# EAGLE board arduino (EAGLE 9.6.2)
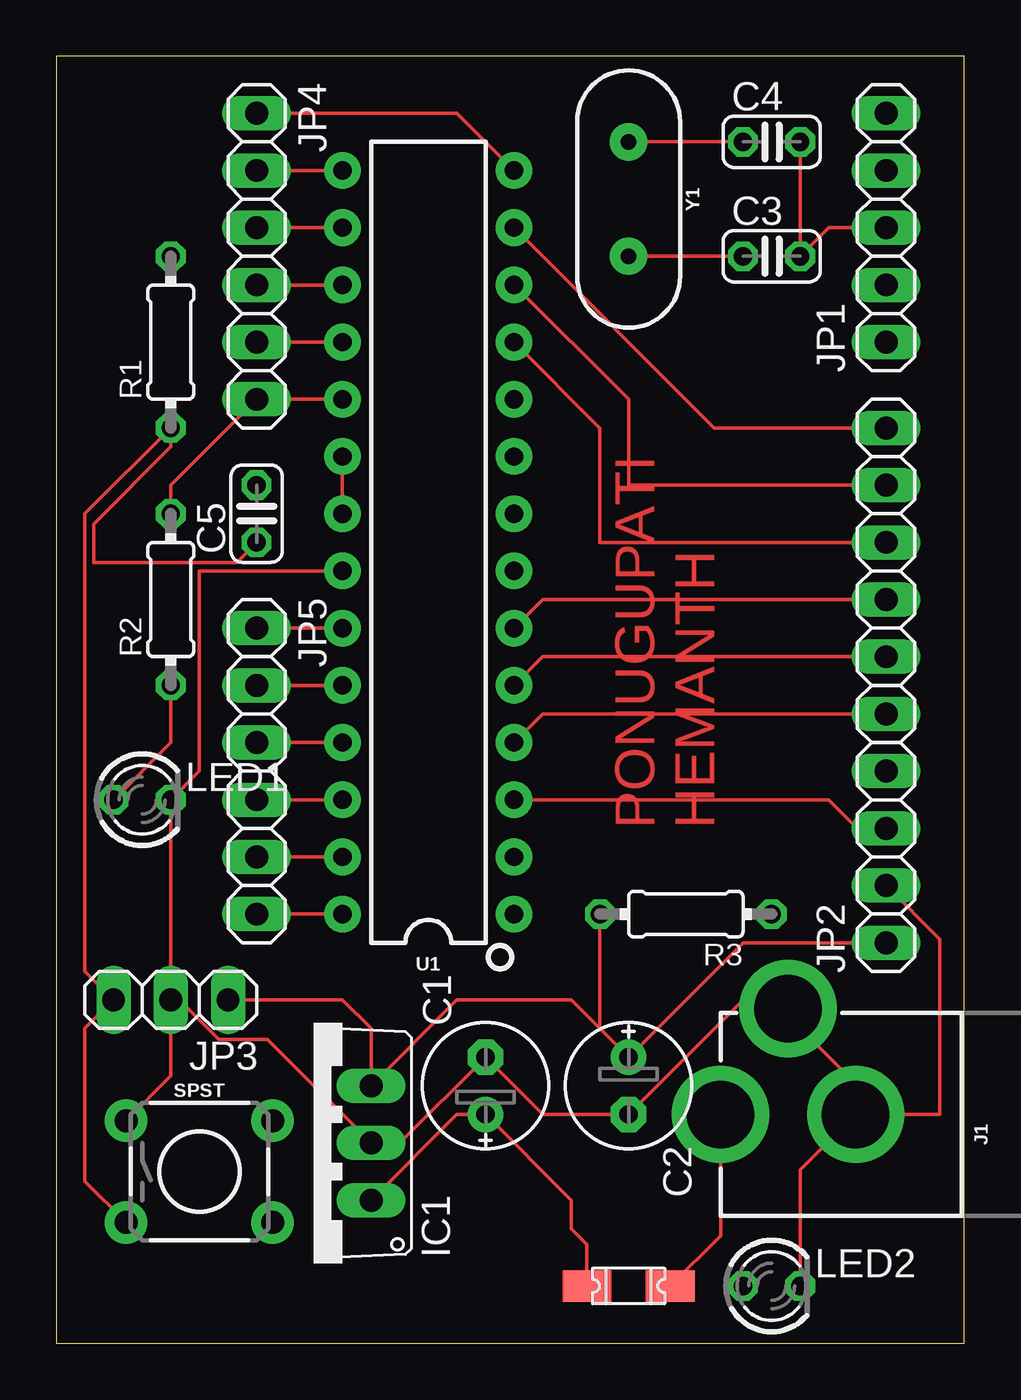
[diagram p0: board, top side]
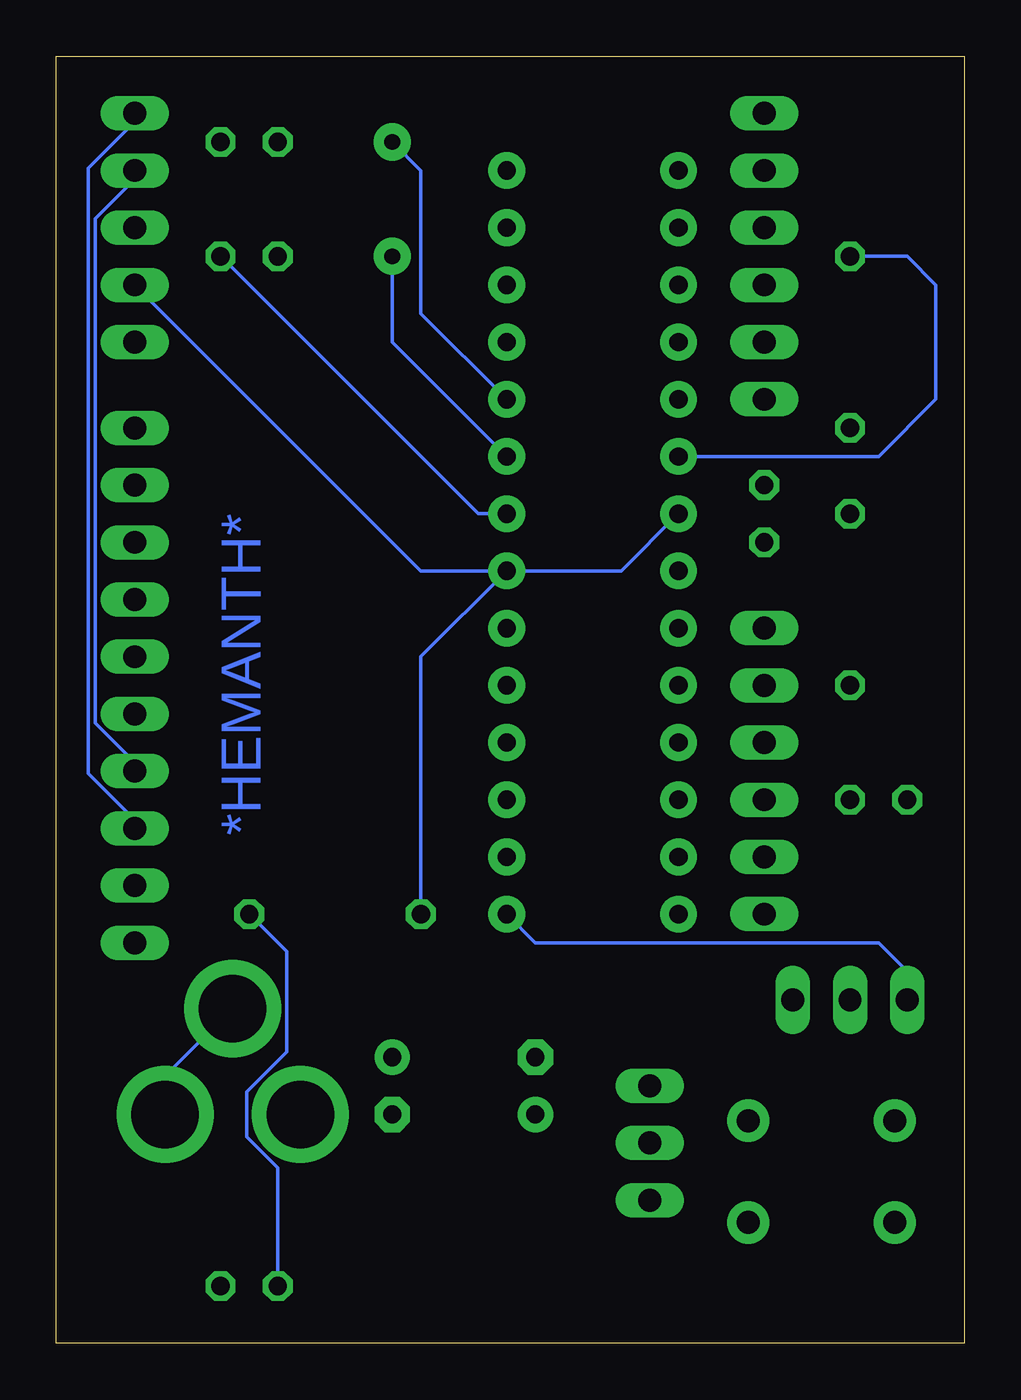
[diagram p1: board, bottom side, seen from below]

Size 40.31 x 57.14 mm. Coordinates in mm from the lower left corner, seen from the top.
Outline: 0,0 40.31,0 40.31,57.14 0,57.14 0,0
Copper layers (1*16): Top 0.035mm / dielectric 1.5mm / Bottom 0.035mm
Design rules "default": minimum track width 6mil, minimum drill 0.35mm, track to track 6mil, track to pad 6mil, pad to pad 6mil, via to via 6mil, smd to smd 6mil, copper to edge 40mil, drill to drill 6mil, minimum pad ring 10mil, minimum via ring 8mil, stop-mask expansion 4mil, vias tented up to drill 0mil, thermal gap 10mil

## Footprints (pad centres in the part's own frame; a part is rotated, then mirrored left to right if it is on the bottom)
E2,5-6E = drill 0.813 pad 1.575: + -1.27,0 | drill 0.813 pad 1.575 octagon: - 1.27,0
C025-024X044 = drill 0.813 octagon: 1 -1.27,0; 2 1.27,0
1206L = smd 2.16 x 1.4: P$1 -1.85,0; P$2 1.85,0
TO220V = drill 1.016 long: 1 -2.54,-2.54; 2 0,-2.54; 3 2.54,-2.54
POWER_JACK_PTH = drill 2.997 pad 4.318: GND 0,7.7; GNDBREAK 4.7,10.7; PWR 0,13.7
1X05 = drill 1.016 long: 1 -5.08,0; 2 -2.54,0; 3 0,0; 4 2.54,0; 5 5.08,0
1X10 = drill 1.016 long: 1 -11.43,0; 2 -8.89,0; 3 -6.35,0; 4 -3.81,0; 5 -1.27,0; 6 1.27,0; 7 3.81,0; 8 6.35,0; 9 8.89,0; 10 11.43,0
1X03 = drill 1.016 long: 1 -2.54,0; 2 0,0; 3 2.54,0
1X06 = drill 1.016 long: 1 -6.35,0; 2 -3.81,0; 3 -1.27,0; 4 1.27,0; 5 3.81,0; 6 6.35,0
LED3MM = drill 0.813 octagon: A -1.27,0; K 1.27,0
0204/7 = drill 0.813 octagon: 1 -3.81,0; 2 3.81,0
TACTILE_SWITCH_PTH_6.0MM = drill 1.016 pad 1.88: 1 -3.251,2.261; 2 3.251,2.261; 3 -3.251,-2.261; 4 3.251,-2.261
DIP28 = drill 0.813 pad 1.626: 1 -16.51,-3.81; 2 -13.97,-3.81; 3 -11.43,-3.81; 4 -8.89,-3.81; 5 -6.35,-3.81; 6 -3.81,-3.81; 7 -1.27,-3.81; 8 1.27,-3.81; 9 3.81,-3.81; 10 6.35,-3.81; 11 8.89,-3.81; 12 11.43,-3.81; 13 13.97,-3.81; 14 16.51,-3.81; 15 16.51,3.81; 16 13.97,3.81; 17 11.43,3.81; 18 8.89,3.81; 19 6.35,3.81; 20 3.81,3.81; 21 1.27,3.81; 22 -1.27,3.81; 23 -3.81,3.81; 24 -6.35,3.81; 25 -8.89,3.81; 26 -11.43,3.81; 27 -13.97,3.81; 28 -16.51,3.81
HC49US = drill 0.7 pad 1.651: 1 -2.54,0; 2 2.54,0

## Placement (x,y rotation side)
C1  10uF  [E2,5-6E]  19.05,11.43 90 top
C2  10uF  [E2,5-6E]  25.4,11.43 270 top
C3  22pF  [C025-024X044]  31.75,48.26 0 top
C4  22pF  [C025-024X044]  31.75,53.34 0 top
C5  22pF  [C025-024X044]  8.89,36.83 90 top
F1  1206L  [1206L]  25.4,2.54 180 top
IC1  7805TV  [TO220V]  11.43,8.89 90 top
J1  POWER_JACK  [POWER_JACK_PTH]  43.18,10.16 90 top
JP1  [1X05]  36.83,49.53 90 top
JP2  [1X10]  36.83,29.21 90 top
JP3  [1X03]  5.08,15.24 180 top
JP4  [1X06]  8.89,48.26 270 top
JP5  [1X06]  8.89,25.4 270 top
LED1  Green  [LED3MM]  3.81,24.13 0 top
LED2  Green  [LED3MM]  31.75,2.54 0 top
R1  10K  [0204/7]  5.08,44.45 90 top
R2  220E  [0204/7]  5.08,33.02 90 top
R3  220E  [0204/7]  27.94,19.05 180 top
SPST  MOMENTARY-SWITCH-SPST-PTH-6.0MM  [TACTILE_SWITCH_PTH_6.0MM]  6.35,7.62 0 top
U1  328P  [DIP28]  16.51,35.56 90 top
Y1  16MHz  [HC49US]  25.4,50.8 270 top

## Library data of the parts
C1-C5 = rcl; SPICEPREFIX: C
F1 = ptc-littlefuse
IC1 = linear
J1 = SparkFun-Connectors; PROD_ID: CONN-08197
JP1-JP5 = pinhead
LED1 LED2 = led
R1-R3 = rcl; SPICEPREFIX: R
SPST = SparkFun-Switches; PROD_ID: SWCH-08441; SF_SKU: COM-00097
U1 = SparkFun-IC-Microcontroller; PROD_ID: IC-09136
Y1 = SparkFun-Clocks; PROD_ID: XTAL-08181; SF_ID: COM-00536

## Nets
A0: JP5.1 U1.23
A1: JP5.2 U1.24
A2: JP5.3 U1.25
A3: JP5.4 U1.26
A4: JP5.5 U1.27
A5: JP5.6 U1.28
D2: JP2.5 U1.4
D3: JP2.6 U1.5
D4: JP2.7 U1.6
D5: JP2.8 U1.11
D6: JP2.9 U1.12
D7: JP2.10 U1.13
D8: JP4.1 U1.14
D9: JP4.2 U1.15
D10: JP4.3 U1.16
D11: JP4.4 U1.17
D12: JP4.5 U1.18
D13: JP4.6 R2.2 U1.19
GND: C1.- C2.- IC1.2 J1.GND J1.GNDBREAK JP2.2 JP3.2 LED1.K LED2.K SPST.1 U1.22
N$1: C1.+ F1.P$2 IC1.1
N$3: C3.1 U1.9 Y1.2
N$4: C4.1 U1.10 Y1.1
N$5: LED2.A R3.1
N$6: LED1.A R2.1
N$7: F1.P$1 J1.PWR
RESET: C5.1 JP3.3 R1.1 SPST.3 U1.1
RX: JP1.4 JP2.4
S$1: C3.2 C4.2 JP1.3 U1.8
TX: JP1.5 JP2.3 U1.3
VCC: C2.+ IC1.3 JP1.2 JP2.1 JP3.1 R1.2 R3.2 U1.7 U1.20 U1.21

## Tracks (layer width: path | path; a pad name or v marks a point on that pad's centre or on a via)
A0
  Top 0.152: JP5.1 U1.23
A1
  Top 0.152: JP5.2 U1.24
A2
  Top 0.152: JP5.3 U1.25
A3
  Top 0.152: JP5.4 U1.26
A4
  Top 0.152: U1.27 JP5.5
A5
  Top 0.152: JP5.6 U1.28
D2
  Top 0.152: U1.4 21.59,27.94 JP2.5
D3
  Top 0.152: U1.5 21.59,30.48 JP2.6
D4
  Top 0.152: U1.6 21.59,33.02 JP2.7
D5
  Top 0.152: U1.11 24.13,40.64 24.13,35.56 JP2.8
D6
  Top 0.152: U1.12 25.4,41.91 25.4,38.1 JP2.9
D7
  Top 0.152: U1.13 29.21,40.64 JP2.10
D8
  Top 0.152: JP4.1 17.78,54.61 U1.14
D9
  Top 0.152: JP4.2 U1.15
D10
  Top 0.152: JP4.3 U1.16
D11
  Top 0.152: JP4.4 U1.17
D12
  Top 0.152: JP4.5 U1.18
D13
  Top 0.152: U1.19 JP4.6 5.08,38.1 R2.2
GND
  Top 0.152: JP3.2 LED1.K 6.35,25.4 6.35,34.29 U1.22 | J1.GND 35.48,11.51 31.75,15.24 30.48,15.24 C2.- 21.59,10.16 C1.- 15.24,8.89 IC1.2 9.37,13.49 7.21,13.49 5.46,15.24 JP3.2 | LED2.K 33.02,7.7 J1.GND | JP3.2 5.08,11.86 SPST.1 | JP2.2 39.22,17.93 39.22,10.16 J1.GND
  Bottom 0.152: J1.GNDBREAK 35.48,11.86 J1.GND
N$1
  Top 0.152: IC1.1 17.78,10.16 C1.+ 22.86,6.35 22.86,5.08 23.55,4.39 F1.P$2
N$3
  Top 0.152: C3.1 Y1.2
  Bottom 0.152: U1.9 25.4,44.45 Y1.2
N$4
  Top 0.152: Y1.1 C4.1
  Bottom 0.152: Y1.1 24.13,52.07 24.13,45.72 U1.10
N$5
  Bottom 0.152: LED2.A 30.48,7.78 31.87,9.17 31.87,11.15 30.09,12.92 30.09,17.39 R3.1
N$6
  Top 0.152: R2.1 5.08,26.67 LED1.A
N$7
  Top 0.152: F1.P$1 29.48,4.77 J1.PWR
RESET
  Top 0.152: SPST.3 1.27,7.19 1.27,13.97 JP3.3 1.27,16.51 1.27,36.83 R1.1 5.08,39.8 1.65,36.37 1.65,34.67 8,34.67 C5.1
  Bottom 0.152: U1.1 19.05,17.78 3.81,17.78 2.54,16.51 JP3.3
RX
  Bottom 0.152: JP1.4 36.83,51.69 38.58,49.94 38.58,27.53 36.83,25.78 JP2.4
S$1
  Top 0.152: JP1.3 34.29,49.53 C3.2 C4.2
  Bottom 0.152: C3.2 21.59,36.83 U1.8
TX
  Top 0.152: U1.3 34.29,24.13 35.56,22.86 JP2.3
  Bottom 0.152: JP2.3 36.83,23.24 38.89,25.29 38.89,52.18 36.83,54.23 JP1.5
VCC
  Top 0.152: C2.+ 24.13,13.97 R3.2 | C2.+ 30.48,17.78 JP2.1 | JP3.1 12.7,15.24 13.97,13.97 IC1.3 17.78,15.24 22.86,15.24 C2.+ | U1.20 U1.21
  Bottom 0.152: U1.7 15.24,34.29 U1.21 | U1.20 3.81,39.37 1.27,41.91 1.27,46.99 2.54,48.26 R1.2 | U1.7 24.13,30.48 R3.2 | JP1.2 24.13,34.29 U1.7

## Text on the board
Top: PONUGUPATI / HEMANTH
Bottom: *HEMANTH*